# Altium PCB Subtrator OPAMP.PcbDoc
Units mm, origin at the board's own origin, x right, y up, seen from the top; angles counter-clockwise.
Board outline 49.16 x 33.53 mm, 2 copper layers (Top Layer, Bottom Layer); 30 components, 20 nets, 78 pads, 4 vias.
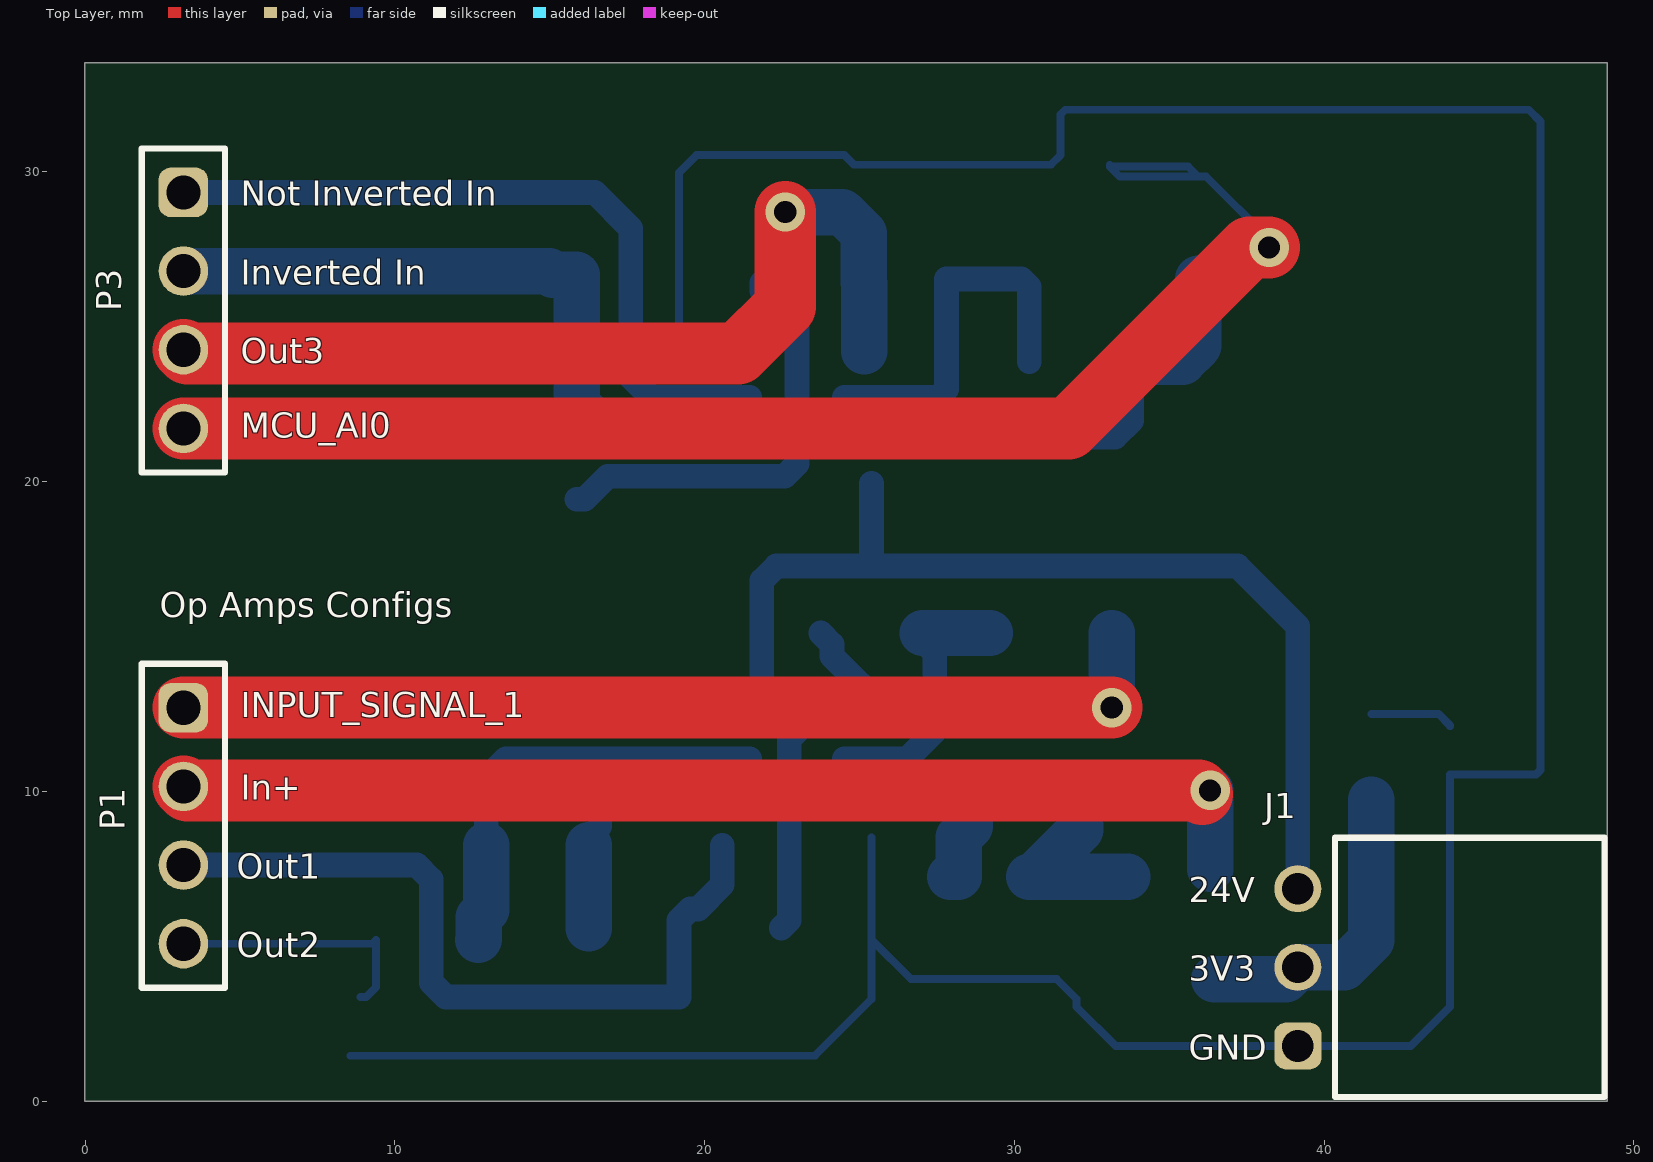
[diagram p0: Top Layer view]
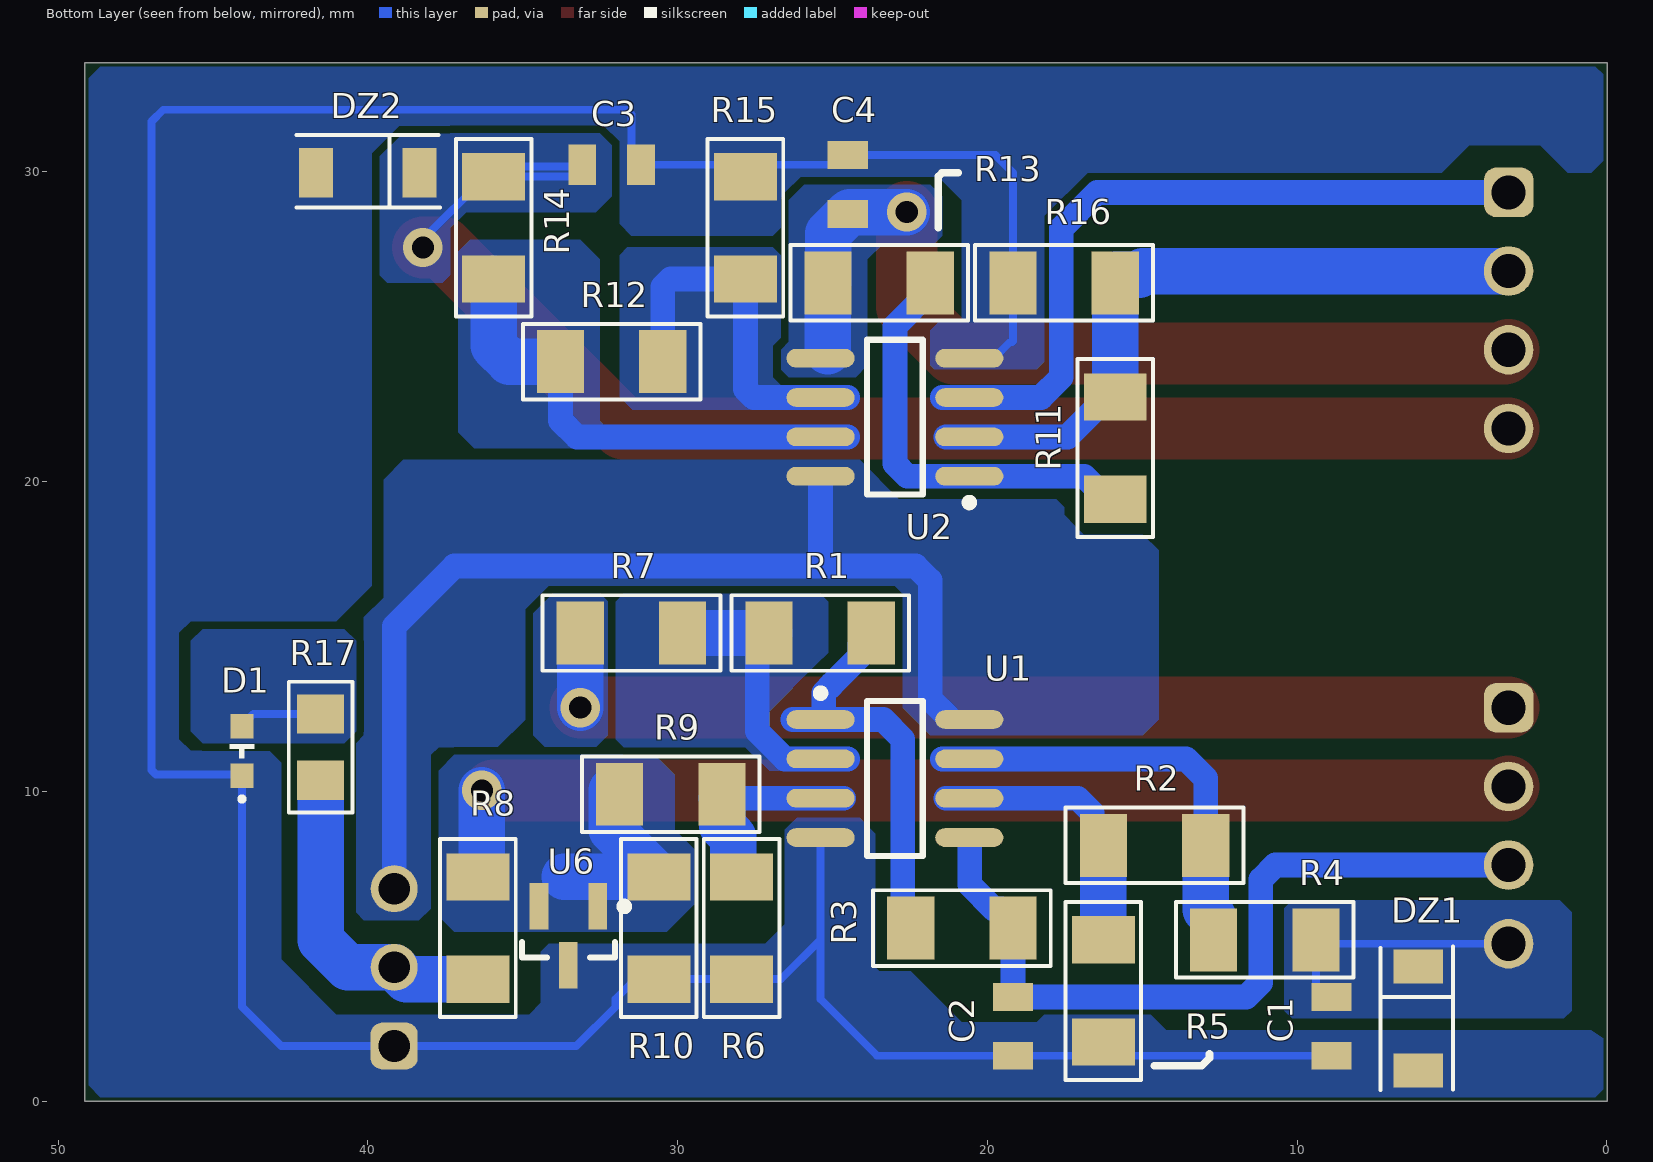
[diagram p1: Bottom Layer view, seen from below]
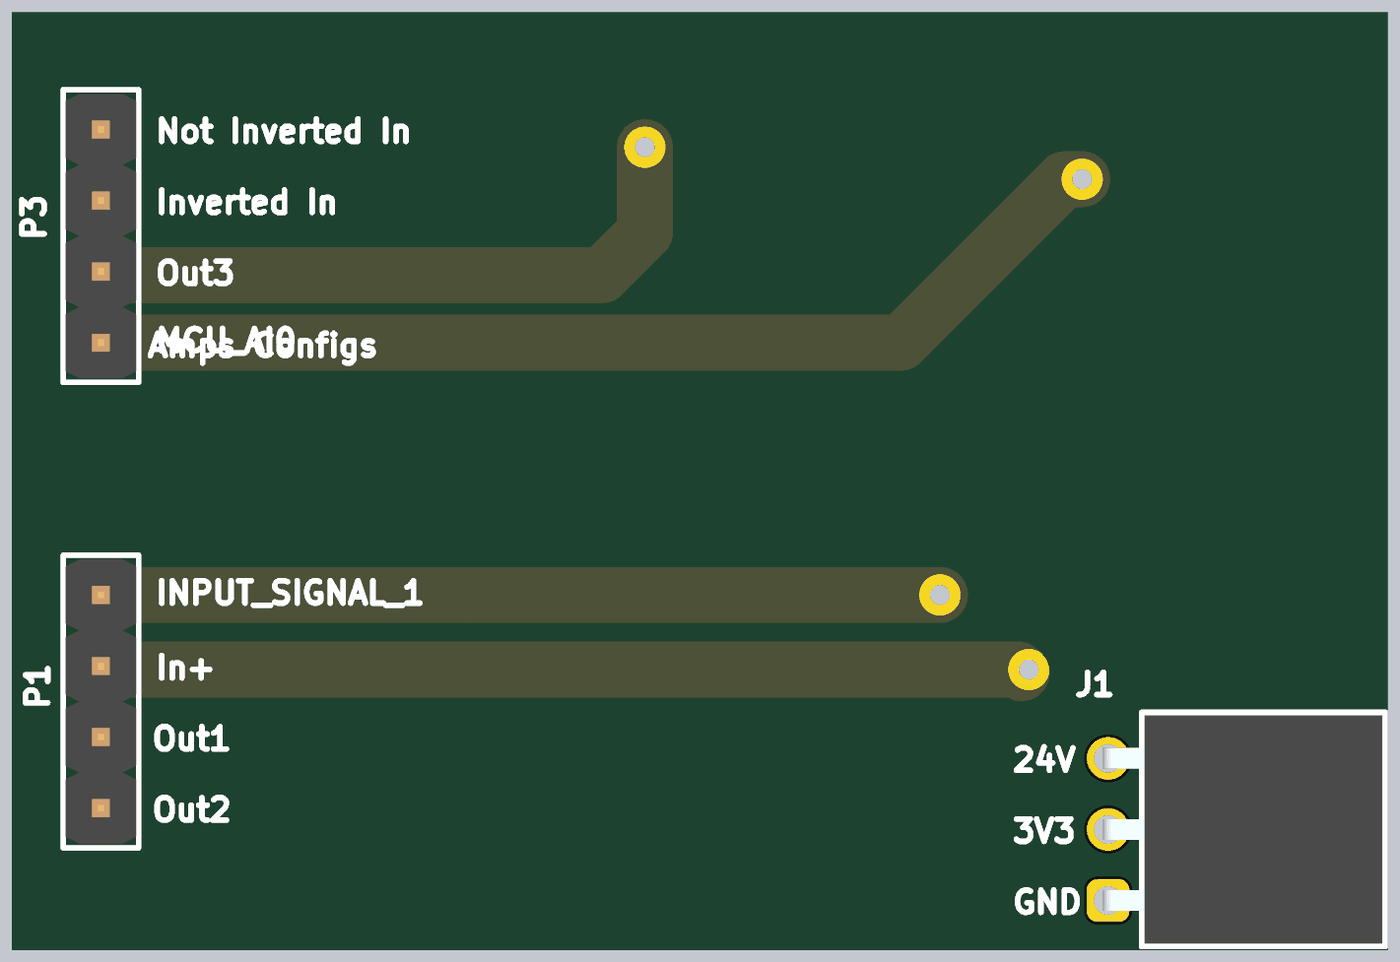
[diagram p2: 3D render of the assembled board from above, using the file's embedded part models]
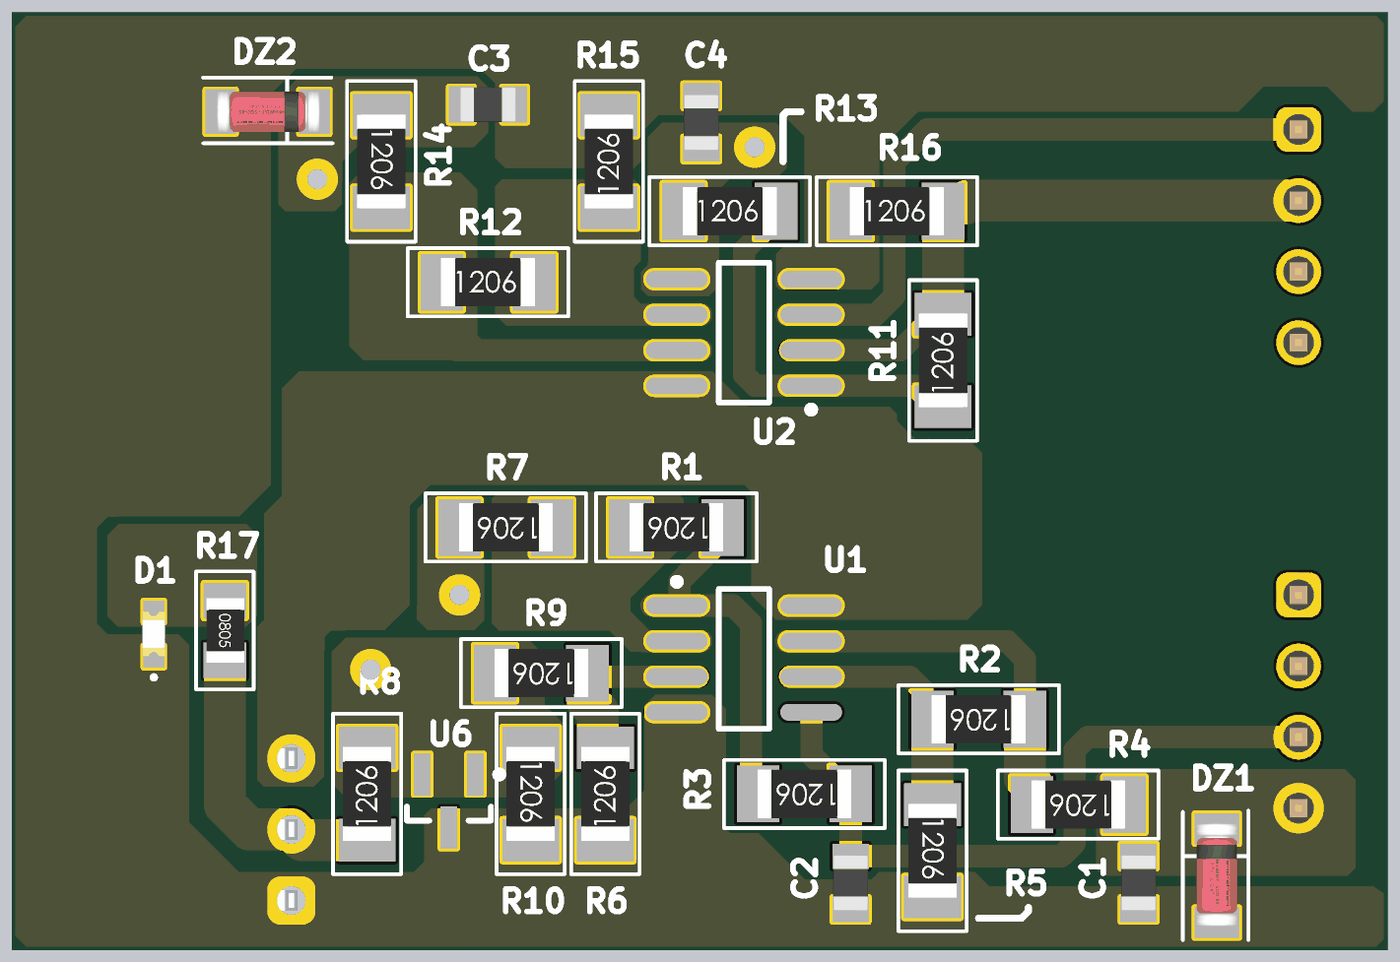
[diagram p3: 3D render of the assembled board from below, using the file's embedded part models]

## Layer stack, top to bottom
Top Solder: solder mask 0.0102, Solder Resist, Dk 3.5
Top Layer: signal copper 0.0356
Dielectric 1: dielectric 0.32, FR-4, Dk 4.8
Bottom Layer: signal copper 0.0356
Bottom Solder: solder mask 0.0102, Solder Resist, Dk 3.5

## Board outline
-0.015,0 49.149,0 49.149,33.528 -0.015,33.528

## Design rules (kind name [scope] priority, off if disabled: settings)
Clearance [All] p1: gap=0.254 ignorepadtopadclearanceinfootprint=FALSE except(0: Arc-Hole Track-Hole SMDPad-Hole THPad-Hole Via-Hole Fill-Hole Poly-Hole Region-Hole Text-Hole; 0.1: Arc-Arc Arc-Track Arc-SMDPad Arc-THPad Arc-Via Arc-Fill Arc-Poly Arc-Region Arc-Text Track-Track Track-SMDPad Track-THPad Track-Via Track-Fill Track-Poly Track-Region Track-Text)
PlaneConnect [All] p1: planeconnectstyle=Direct reliefexpansion=0.508 reliefentries=4 reliefconductorwidth=0.254 reliefairgap=0.254
PolygonConnect [All] p1: connectstyle=Direct reliefconductorwidth=0.254 reliefentries=4 polygonreliefangle="90 Angle" airgapwidth=0.254
RoutingVias [All] p1: holewidth=0.711 width=1.27 viastyle="Through Hole" minholewidth=0.711 minwidth=1.27 maxholewidth=0.711 maxwidth=1.27
SolderMaskExpansion [All] p1: expansion=0.102 istentingtop=FALSE
Width [All] p1: maxlimit=15 minlimit=0.254 preferedwidth=0.254 minimp=50.000000 maximp=50.000000 favimp=50.000000
29 further rules are at their usual default settings.

## Components (designator, comment, footprint, x,y, rotation, side; value= is the part's Value field where it differs from the comment)
C1 "TBD" WCAP-CSGP_0805_H=0.6mm_Reflow 8.89,2.413 r90 bottom
C2 "TBD" WCAP-CSGP_0805_H=0.6mm_Reflow 19.177,2.413 r90 bottom
C3 "TBD" WCAP-CSGP_0805_H=0.6mm_Reflow 32.131,30.228 r0 bottom
C4 "TBD" WCAP-CSGP_0805_H=0.6mm_Reflow 24.513,29.591 r270 bottom
D1 "Red, 2V, 140°" WL-SMCD_0603 44.069,11.303 r90 bottom
DZ1 "3V3/0.5W" SOD80 6.096,2.667 r270 bottom
DZ2 "3V3/0.5W" SOD80 40.005,29.972 r0 bottom
J1 "613003143121" 613003143121 44.704,4.318 r90 top
P1 "61300411121" 61300411121 3.175,8.89 r270 top
P3 "61300411121" 61300411121 3.175,25.527 r270 top
R1 "TBD" SM/R_1206 25.4,15.113 r0 bottom
R2 "0R" SM/R_1206 14.605,8.255 r0 bottom
R3 "TBD" SM/R_1206 20.828,5.588 r0 bottom
R4 "SMRes" SM/R_1206 11.049,5.207 r0 bottom
R5 "NM" SM/R_1206 16.256,3.556 r270 bottom
R6 "TBD" SM/R_1206 27.94,5.588 r90 bottom
R7 "TBD" SM/R_1206 31.496,15.113 r0 bottom
R8 "220R" SM/R_1206 36.449,5.588 r90 bottom
R9 "TBD" SM/R_1206 30.226,9.906 r0 bottom
R10 "NM" SM/R_1206 30.607,5.588 r270 bottom
R11 "TBD" SM/R_1206 15.875,21.082 r90 bottom
R12 "0R" SM/R_1206 32.131,23.876 r180 bottom
R13 "TBD" SM/R_1206 23.495,26.416 r180 bottom
R14 "SMRes" SM/R_1206 35.941,28.194 r270 bottom
R15 "NM" SM/R_1206 27.813,28.194 r90 bottom
R16 "TBD" SM/R_1206 17.526,26.416 r180 bottom
R17 "65R" SM/R_0805 41.529,11.43 r270 bottom
U1 "LM2903D" SO8_N 22.987,10.414 r180 bottom
U2 "LM2903D" SO8_N 22.987,22.079 r0 bottom
U6 "TL431AIL3T" SOT23-3_N 33.528,5.334 r270 bottom

## Footprints (in the part's own frame and the unit in brackets; to place one, negate y for a bottom-side part, rotate by r counter-clockwise, add the part's x,y. Pads: shape width x height; smd on the part's side, far side on the other; paste and mask are expansions set on the pad)
61300411121 [mm] "Pin Header, pitch 2.54 mm, THT, Vertical, single row, 4p"
  rrect50% 1.6x1.6 hole 1.1: 1(-3.81,0)
  round 1.6 hole 1.1: 2(-1.27,0) 3(1.27,0) 4(3.81,0)
  silkscreen extent -5.23,-1.35 5.23,1.35, body extent -5.08,-1.27 5.08,1.27, height 8.57
613003143121 [mm] "Socket Header, Pitch 2.54 mm, THT, Angled, single row, 3p"
  rrect50% 1.52x1.52 hole 1.02: 1(-2.54,5.55)
  round 1.52 hole 1.02: 2(0,5.55) 3(2.54,5.55)
  silkscreen extent -4.19,-4.35 4.19,4.35, body extent -4.06,-4.25 4.06,5.75, height 2.55
SM/R_0805 [mil]
  rect 50x60 smd: 1(-42,0) 2(42,0)
  silkscreen extent -83,-41 83,41, body extent -45,-26 45,27, height 30
SM/R_1206 [mil]
  rect 60x80 smd: 1(-65,0) 2(65,0)
  silkscreen extent -113,-48 113,48, body extent -66,-34 66,34, height 33
SO8_N [mm] "SOIC, 8-Leads, Body 4.9x3.9mm, Pitch 1.27mm, IPC Medium Density"
  oval 2.2x0.6 smd: 1(-2.4,1.905) 2(-2.4,0.635) 3(-2.4,-0.635) 4(-2.4,-1.905) 5(2.4,-1.905) 6(2.4,-0.635) 7(2.4,0.635) 8(2.4,1.905)
  silkscreen extent -2.53,-2.5 0.9,2.88, body extent -1.95,-2.45 1.95,2.45, height 1.75
SOD80 [mm] "LL4148"
  rect 1.1x1.6 smd: A(1.675,0) K(-1.675,0)
  silkscreen extent -2.32,-1.22 2.3,1.13, body extent -1.88,-0.8 1.82,0.8, height 1.6
SOT23-3_N [mm] "SOT23, 3-Leads, Body 2.9x1.3mm, Pitch 0.95mm, Lead Span 2.4mm, IPC Medium Density"
  rect 1.5x0.6 smd: 1(-0.95,0.95) 2(-0.95,-0.95) 3(0.95,0)
  silkscreen extent -1.07,-1.5 0.7,1.92, body extent -0.7,-1.52 0.7,1.52, height 1.12
WCAP-CSGP_0805_H=0.6mm_Reflow [mm] "Ceramic Capacitors, body 2x1.25mm"
  rect 0.9x1.3 smd: 1(-0.95,0) 2(0.95,0)
  body extent -1,-0.62 1,0.63, height 0.6
WL-SMCD_0603 [mm] "SMD Mono-color Chip LED, body 1.6x0.8mm"
  rect 0.8x0.75 smd: 1(-0.8,0) 2(0.8,0)
  silkscreen extent -1.62,-0.4 0.22,0.4, body extent -0.8,-0.4 0.8,0.4, height 0.42

## Part data
C1 C2 C3 C4: library part 885012007010, "WCAP-CSGP Multilayer Ceramic Chip Capacitor, General Purpose, size 0805, NP0, 10pF, 16V", Capacitance=10pF, Capacitance Tolerance=+/-5%, Isolation Resistance=>=10GOhm, Manufacturer="Wurth Elektronik", Operating Temperature="-55 to +125degC", Rated Voltage=16VDC, Ceramic Type=NP0, ComponentLink1Description=Manufacturer, ComponentLink1URL=http://www.we-online.de, ComponentLink2Description=Datasheet, ComponentLink2URL=https://www.we-online.com/catalog/datasheet/885012007010.pdf, Dissipation Factor=Q>=400+20C, Height=0.6mm, Manufacturer Part Number=885012007010, Mounting Technology=SMT, Packaging="Tape and Reel", Published Date="May 2020", Size=0805, Technical Reference=NP00805100J016DFCT10000
D1: library part 150060RS55040, "WL-SMCD Mono-color Chip LED Diffused, SMT, size 0603, Red, 2V, 140°", Case/Size Code=0603, Emitting Color=Red, Forward Voltage=2V, Manufacturer="Wurth Elektronik", Operating Temperature Max=85°C, Operating Temperature Min=-40°C, Category="Signal LEDs", Chip Technology=AlInGaP, ComponentLink1Description="Website Link", ComponentLink1URL=https://www.we-online.com/redexpert/article/150060RS55040?ad, ComponentLink2Description="Datasheet Link", ComponentLink2URL=https://www.we-online.com/redexpert/spec/150060RS55040?ad, Dominant Wavelength=624nm, Height=0.4mm, Length=1.6mm, Luminous Intensity=90mcd, Manufacturer Part Number=150060RS55040, Match Code=WL-SMCD, Mount="Surface Mount", Packaging="Tape and Reel", Peak Wavelength=632nm, Viewing Angle=140°, Width=0.8mm
DZ1 DZ2: library part SOD80_zener, "DIODE ZENER 22V 500MW SOD80C", Manufacturer=Nexperia, Manufacturer Part Number=BZV55-C22,115, Supplier Part Number 1=96K7268, Category="Zener Diodes", ComponentLink1Description=https://assets.nexperia.com/documents/data-sheet/BZV55_SER.pdf?src-supplier=Digi-Key, ComponentLink1URL=https://assets.nexperia.com/documents/data-sheet/BZV55_SER.pdf?src-supplier=Digi-Key, Pricing 1="5=0.22000, 10=0.20800, 25=0.14200, 50=0.11200, 100=0.09200, 250=0.07200, 500=0.05500, 1000=0.04800 (USD)", RoHS=Yes, RoHS Compliant=Yes, Stock 1=10881, Supplier 1=Newark
J1: "WR-PHD Socket Header, THT, Angled, pitch 2.54mm, 1 Row, 3P", Contact Resistance=20mΩ, Manufacturer="Wurth Elektronik", Operating Temperature Max=125°C, Operating Temperature Min=-40°C, Rated Current=3A, Withstanding Voltage=500V, Working Voltage=250V, Category="Board-to-Board Connectors", ComponentLink1Description="Website Link", ComponentLink1URL=https://www.we-online.com/redexpert/article/613003143121?ad, ComponentLink2Description="Datasheet Link", ComponentLink2URL=https://www.we-online.com/redexpert/spec/613003143121?ad, Gender="Socket Header", Manufacturer Part Number=613003143121, Match Code=WR-PHD, Mount="Through Hole", Number of Pins=3, Number of Rows=1, Orientation=Angled, Packaging=Tray, Pitch=2.54mm
P1 P3: "WR-PHD Pin Header, THT, Vertical, pitch 2.54mm, 1 Row, 4P", Contact Resistance=20mΩ, Manufacturer="Wurth Elektronik", Operating Temperature Max=105°C, Operating Temperature Min=-40°C, Rated Current=3A, Withstanding Voltage=500V, Working Voltage=250V, Category="Board-to-Board Connectors", ComponentLink1Description="Website Link", ComponentLink1URL=https://www.we-online.com/redexpert/article/61300411121?ad, ComponentLink2Description="Datasheet Link", ComponentLink2URL=https://www.we-online.com/redexpert/spec/61300411121?ad, Gender="Pin Header", Manufacturer Part Number=61300411121, Match Code=WR-PHD, Mount="Through Hole", Number of Pins=4, Number of Rows=1, Orientation=Vertical, Packaging=Bag, Pitch=2.54mm
R1 R2 R3 R5 R6 R7 R8 R9 R10 R11 R12 R13 R15 R16 R17: library part SMRes, "SMD Resistor", Resistor Type="FIXED RESISTOR", Category="Chip SMD Resistors", Mount="Surface Mount", Mounting=SMD, Number of Pins=2, Pricing 1="10=0.67400, 100=0.52000, 250=0.49300, 500=0.33100, 1000=0.28900 (USD)", RoHS=Yes, Stock 1=1
R4 R14: "SMD Resistor", Resistor Type="FIXED RESISTOR", Category="Chip SMD Resistors", Mount="Surface Mount", Mounting=SMD, Number of Pins=2, Pricing 1="10=0.67400, 100=0.52000, 250=0.49300, 500=0.33100, 1000=0.28900 (USD)", RoHS=Yes, Stock 1=1
U1 U2: "Low-Power Dual Voltage Comparator", Code_IPC=SOIC127P600-8, Code_JEDEC=MS-012-AA, ComponentLink1Description="Manufacturer Link", ComponentLink1URL=http://www.st.com/, ComponentLink2Description=Datasheet, ComponentLink2URL=http://www.st.com/stonline/products/literature/ds/2470/lm2903.pdf, DatasheetVersion=Oct-1999, LatestRevisionDate=13-Apr-2006, LatestRevisionNote="IPC-7351 Footprint Added.", PackageDescription="8-Pin Small Outline Integrated Circuit 1.27 mm Pitch", PackageReference=SO8, PackageVersion=Dec-2002, Published=24-Aug-2001, Publisher="Altium Limited"
U6: "STMICROELECTRONICS - TL431AIL3T - Voltage Reference, AEC-Q100, Shunt - Adjustable, 2.5V to 36V, 1 % Ref, SOT-23-3", Case/Package=SOT-23-3, Cathode Current=700uA, Manufacturer=STMicroelectronics, Max Input Voltage=37V, Max Operating Temperature=105°C, Max Output Current=100mA, Max Output Voltage=36V, Min Operating Temperature=-40°C, Package Quantity=1, Reference Voltage=2.495V, Supplier Part Number 1=497-11295-1-ND, Tolerance=1%, Accuracy=1%, Category="Voltage References", ComponentLink1Description="Manufacturer URL", ComponentLink1URL=http://www.st.com, ComponentLink2Description=Datasheet, ComponentLink2URL=http://www.st.com/internet/com/TECHNICAL_RESOURCES/TECHNICAL_LITERATURE/DATASHEET/CD00000986.pdf, ComponentLink3Description=https://datasheet.ciiva.com/41424/001184461-da-01-en-ic-vref-shunt-pr-tl431ail3t-sot-23-3-stm-41424435.pdf?src-supplier=Conrad, ComponentLink3URL=https://datasheet.ciiva.com/41424/001184461-da-01-en-ic-vref-shunt-pr-tl431ail3t-sot-23-3-stm-41424435.pdf?src-supplier=Conrad, ComponentLink4Description=https://datasheet.ciiva.com/2006/cd00000986-2006624.pdf?src-supplier=Digi-Key, ComponentLink4URL=https://datasheet.ciiva.com/2006/cd00000986-2006624.pdf?src-supplier=Digi-Key, ComponentLink5Description=https://datasheet.ciiva.com/2006/cd00000986-2006625.pdf?src-supplier=Digi-Key, ComponentLink5URL=https://datasheet.ciiva.com/2006/cd00000986-2006625.pdf?src-supplier=Digi-Key, ComponentLink6Description=https://datasheet.ciiva.com/2006/cd00000986-2006626.pdf?src-supplier=Digi-Key, ComponentLink6URL=https://datasheet.ciiva.com/2006/cd00000986-2006626.pdf?src-supplier=Digi-Key, ComponentLink7Description=https://datasheet.ciiva.com/4908/cd00000986-4908895.pdf?src-supplier=Mouser, ComponentLink7URL=https://datasheet.ciiva.com/4908/cd00000986-4908895.pdf?src-supplier=Mouser, ComponentLink8Description=https://datasheet.ciiva.com/17565/cd00000986-17565254.pdf?src-supplier=Avnet+Europe, ComponentLink8URL=https://datasheet.ciiva.com/17565/cd00000986-17565254.pdf?src-supplier=Avnet+Europe, DatasheetVersion=Oct-2011, Lead Free="Lead Free", Manufacturer Part Number=TL431AIL3T, Mount="Surface Mount", Number of Channels=1, Number of Pins=3, Output Current=100mA, Output Voltage=36V, PackageDescription="3-Pin SOT-23 Package 0.95 mm Pitch, 2.4 mm Lead Span", PackageReference=SOT23-3, PackageVersion=2011, Packaging="Tape and Reel", Pricing 1="1=0.47000, 10=0.38000, 25=0.34720, 100=0.25850, 250=0.23424, 500=0.19386, 1000=0.14539 (USD)", Radiation Hardening=No, Reference Type=Shunt,Adjustable, RoHS=Yes, RoHS Compliant=Yes, Series=-, Stock 1=3767, Supplier 1=Digi-Key

## Via types
v1: diameter 1.27, hole 0.711, Top Layer to Bottom Layer, 4 vias

## Nets (pads, with @x,y where several pads share a name; then routed paths per layer and width w, separated by ;. In a path a pad name is that pad's centre, name@x,y a point inside that pad or via, vN(x,y) a via of type N, cw(c..) or ccw(c..) an arc to the next point about the centre after c; other vN are vias at no path point)
3V3: J1.2 R8.1 R17.2 | length 10.1
  Bottom Layer w1.5: R8.1 38.768,3.937 39.149,4.318 J1.2 40.65,4.318 41.529,5.197 R17.2@41.529,9.728
+24: J1.3 U1.8 U2.8 | length 34.1
  Bottom Layer w0.8: U1.8@21.287,12.419 21.844,12.976 21.844,16.803 22.313,17.272 25.4,17.272 ; U2.8@25.387,19.939 25.387,17.285 25.4,17.272 ; J1.3 39.154,15.329 37.211,17.272 25.4,17.272
INPUT+: P1.2 R8.2 R9.2 R10.1 U6.1 U6.2 | length 42.5
  Top Layer w2: P1.2 3.302,10.033 35.941,10.033 v1@36.068,9.906
  Bottom Layer w0.254: R8.2@36.322,7.493 R8.2@36.449,7.366
  Bottom Layer w1.5: R10.1@30.48,7.239 33.655,7.239 ; R10.1 30.861,7.239 30.873,7.251 30.873,7.505 32.131,8.763 R9.2@32.131,10.033 ; R8.2@36.322,7.493 v1(36.322,10.033)
INPUT-: P1.1 R7.2 | length 32.4
  Top Layer w2: P1.1 v1(33.147,12.7)
  Bottom Layer w1.5: v1(33.147,12.7) R7.2
INPUT_INVERTED: P3.2 R11.2 R16.2 U2.2 | length 22.7
  Bottom Layer w0.254: R11.2 R11.2@16.129,22.733
  Bottom Layer w0.8: R11.2@16.129,22.733 17.418,21.444 U2.2 U2.2@21.336,21.444
  Bottom Layer w1.5: P3.2 14.984,26.797 15.099,26.682 15.863,26.682 15.875,26.67 R11.2
INPUT_SENSE: P3.1 U2.3 | length 23.8
  Bottom Layer w0.8: P3.1 16.457,29.337 17.621,28.172 17.621,23.368 18.275,22.714 U2.3 U2.3@21.463,22.714
NetD1_2: D1.2 R17.1 | length 2.7
  Bottom Layer w0.254: R17.1 43.7,12.497 44.069,12.128 D1.2
NetR1_1: R1.1 R3.2 U1.1 | length 13.4
  Bottom Layer w0.8: R3.2 22.733,5.842 22.733,11.684 23.368,12.319 U1.1 U1.1@26.289,12.319 ; R1.1 24.111,14.751 24.111,14.37 25.019,13.462 25.019,13.45 25.287,13.182 U1.1@25.287,12.419
NetR1_2: R1.2 R7.1 U1.2 | length 8.8
  Bottom Layer w0.8: U1.2@24.511,11.049 26.543,11.049 27.432,11.938 27.432,14.478 27.051,14.859 R1.2
  Bottom Layer w1.5: R1.2 R7.1@29.21,15.113
NetR2_1: R2.1 R4.2 U1.7 | length 14.1
  Bottom Layer w0.8: R2.1 12.954,10.414 13.589,11.049 U1.7 U1.7@21.463,11.049
  Bottom Layer w1.5: R4.2 12.712,5.219 12.712,5.936 12.954,6.178 R2.1
NetR2_2: R2.2 R5.1 U1.6 | length 9.3
  Bottom Layer w0.254: R5.1 16.383,5.207 16.51,5.334 R5.1@16.256,5.588 ; R2.2 R2.2@16.256,8.832
  Bottom Layer w0.8: R2.2@16.579,8.832 16.618,8.871 16.618,9.31 17.087,9.779 U1.6@21.336,9.779
  Bottom Layer w1.5: R5.1@16.256,5.588 R2.2
NetR6_2: R6.2 R9.1 U1.3 | length 6.9
  Bottom Layer w0.8: U1.3@24.638,9.779 U1.3 R9.1@28.575,9.779
  Bottom Layer w1.5: R6.2 28.194,7.239 28.206,7.251 28.206,8.521 28.563,8.878 28.563,9.767 R9.1@28.575,9.779
NetR11_1: R11.1 R13.2 U2.1 | length 13.9
  Bottom Layer w0.8: R11.1 16.129,19.431 16.872,20.174 22.587,20.174 22.987,20.574 22.987,25.019 21.844,26.162 R13.2
NetR12_1: R12.1 R14.2 U2.7 | length 15.9
  Bottom Layer w0.8: U2.7@24.511,21.444 U2.7 33.255,21.444 33.782,21.971 R12.1
  Bottom Layer w1.5: R12.1 35.433,23.876 35.941,24.384 R14.2
NetR12_2: R12.2 R15.1 U2.6 | length 12.2
  Bottom Layer w0.8: U2.6@24.511,22.714 U2.6 27.54,22.714 27.813,22.987 R15.1 30.226,26.543 30.48,26.289 R12.2
OUT1: C2.2 P1.3 R3.1 U1.5 | length 25.3
  Bottom Layer w0.8: P1.3 10.707,7.62 11.176,7.151 11.176,3.832 11.645,3.363 C2.2 R3.1 19.177,5.842 19.539,6.204 19.793,6.204 20.574,6.985 U1.5@20.574,8.255
OUT2: C1.2 DZ1.K P1.4 R4.1 | length 8.4
  Bottom Layer w0.254: P1.4 9.271,5.08 R4.1 9.398,3.686 9.075,3.363 C1.2
OUT3: C4.2 P3.3 R13.1 U2.5 | length 29.8
  Top Layer w2: P3.3 3.302,24.13 21.082,24.13 22.606,25.654 v1(22.606,28.702)
  Bottom Layer w1.5: v1(22.606,28.702) 24.452,28.702 25.134,28.02 25.134,26.428 R13.1@25.158,26.404 ; R13.1 R13.1@25.158,26.404 ; U2.5@25.158,24.213 R13.1@25.158,26.404
OUT4: C3.2 DZ2.K P3.4 R14.1 | length 46.9
  Top Layer w2: P3.4 31.75,21.717 37.592,27.559 v1(38.227,27.559)
  Bottom Layer w0.254: C3.2 C3.2@33.081,30.168 ; v1(38.227,27.559) 38.227,27.813 36.195,29.845 R14.1 ; C3.2@33.081,30.168 35.618,30.168 R14.1 ; C3.2@33.081,30.168 33.404,29.845 R14.1
Signal_Ref: C1.1 C2.1 C3.1 C4.1 D1.1 DZ1.A DZ2.A J1.1 R5.2 R6.1 R10.2 R15.2 R16.1 U1.4 U2.4 U6.3 | length 111.9
  Bottom Layer w0.254: C1.1@8.572,1.463 16.256,1.463 C2.1 23.561,1.463 25.387,3.289 25.387,5.22 ; U2.4 19.787,23.984 19.26,24.511 19.199,24.511 19.177,24.533 R16.1 19.177,29.972 19.746,30.541 C4.1 24.826,30.228 27.813,30.228 C3.1 31.496,30.543 31.496,31.855 31.645,32.004 46.609,32.004 46.99,31.623 46.99,10.69 46.841,10.541 44.069,10.541 44.069,3.048 42.799,1.778 J1.1 33.274,1.778 32.004,3.048 32.004,3.302 31.369,3.937 29.718,3.937 28.321,3.937 26.67,3.937 25.387,5.22 ; U1.4 25.387,5.22

## Polygon pours and split planes (outlines as drawn)
NetR12_1 on Bottom Layer "NETR12_1_L02_P008" (solid, pour order 8): 36.576,21.082 37.084,21.59 37.084,27.432 36.703,27.813 33.147,27.813 32.512,27.178 32.512,21.971 32.004,21.463 32.004,21.082
OUT4 on Bottom Layer "OUT4_L02_P002" (solid, pour order 2): 36.83,28.702 37.338,28.194 37.338,26.67 37.592,26.416 39.37,26.416 39.624,26.67 39.624,30.607 38.989,31.242 38.984,31.237 38.359,31.237 38.354,31.242 32.512,31.242 32.131,30.861 32.131,29.21 32.639,28.702
INPUT+ on Bottom Layer "INPUT+_L02_P005" (solid, pour order 5): 30.099,8.763 29.464,8.128 29.464,6.35 30.353,5.461 37.211,5.461 37.719,5.969 37.719,10.668 37.211,11.176 30.734,11.176 30.099,10.541
INPUT- on Bottom Layer "INPUT-_L02_P010" (solid, pour order 10): 32.258,11.811 32.639,11.43 34.29,11.43 34.671,11.811 34.671,15.748 34.036,16.383 32.512,16.383 32.258,16.129
NetR1_2 on Bottom Layer "NETR1_2_L02_P009" (solid, pour order 9): 25.527,14.097 25.146,14.478 25.146,16.129 25.4,16.383 31.75,16.383 32.004,16.129 32.004,11.684 31.75,11.43 27.813,11.43 27.051,10.668 26.162,10.668 26.162,11.176 27.051,12.065 27.051,12.573
+24 on Bottom Layer "+24_L02_P007" (solid, pour order 7): 14.478,17.78 14.986,18.288 16.891,18.288 17.526,18.923 17.526,19.177 17.78,19.431 18.415,19.431 22.86,19.431 24.13,20.701 38.862,20.701 39.497,20.066 39.497,16.256 40.132,15.621 40.132,11.811 40.386,11.557 40.386,6.096 40.132,5.842 38.354,5.842 37.973,6.223 37.973,11.176 37.719,11.43 35.814,11.43 34.925,12.319 34.925,15.875 34.163,16.637 22.987,16.637 22.733,16.383 22.733,12.7 21.844,11.811 14.986,11.811 14.478,12.319
Signal_Ref on Bottom Layer "SIGNAL_REF_L02_P006" (solid, pour order 6): 34.798,2.794 34.417,3.175 34.417,4.826 34.163,5.08 27.178,5.08 26.543,5.715 26.543,8.763 26.162,9.144 24.13,9.144 23.622,8.636 23.622,4.318 23.495,4.191 22.479,4.191 20.828,2.54 18.415,2.54 18.161,2.794 14.732,2.794 14.224,2.286 0.508,2.286 0.127,2.032 0.127,0.381 0.381,0.127 48.641,0.127 49.022,0.508 49.022,33.02 48.641,33.401 0.381,33.401 0.127,33.147 0.127,30.353 0.508,29.972 1.27,29.972 2.159,30.861 4.445,30.861 5.334,29.972 16.764,29.972 18.161,28.575 18.161,23.876 18.415,23.622 21.717,23.622 21.844,23.749 21.844,24.892 21.59,25.146 21.082,25.146 20.828,25.4 20.828,29.083 21.59,29.845 26.035,29.845 26.543,29.337 26.543,28.321 26.924,27.94 31.496,27.94 31.877,28.321 31.877,30.988 32.385,31.496 38.989,31.496 39.878,30.607 39.878,16.637 41.021,15.494 45.72,15.494 46.101,15.113 46.101,11.684 45.72,11.303 43.18,11.303 42.799,10.922 42.799,4.572 41.021,2.794
OUT3 on Bottom Layer "OUT3_L02_P004" (solid, pour order 4): 24.257,23.368 26.416,23.368 26.67,23.622 26.67,24.257 26.416,24.511 26.416,29.083 25.908,29.591 21.844,29.591 21.463,29.21 21.463,27.94 21.717,27.686 23.368,27.686 23.876,27.178 23.876,23.749
NetR12_2 on Bottom Layer "NETR12_2_L02_P003" (solid, pour order 3): 26.924,23.368 26.543,22.987 26.543,22.352 26.866,22.352 26.9,22.318 31.462,22.318 31.877,22.733 31.877,27.305 31.623,27.559 26.924,27.559 26.67,27.305 26.67,24.638 26.924,24.384
NetD1_2 on Bottom Layer "NETD1_2_L02_P001" (solid, pour order 1): 40.386,14.859 40.767,15.24 45.339,15.24 45.72,14.859 45.72,11.938 45.339,11.557 40.767,11.557 40.386,11.938
OUT2 on Bottom Layer "OUT2_L02_P000" (solid, pour order 0): 1.143,6.096 1.524,6.477 10.16,6.477 10.414,6.223 10.414,2.921 10.16,2.667 1.397,2.667 1.143,2.921

## Silkscreen, mask and mechanical layers (free items; w line width, h text height)
Top Overlay:
  text "Not Inverted In" at 5.026,28.902 h0.8
  text "Inverted In" at 5.026,26.362 h0.8
  text "Out3" at 5.026,23.822 h0.8
  text "MCU_AI0" at 5.026,21.415 h0.8
  text "Op Amps Configs" at 2.413,15.621 h0.8
  text "INPUT_SIGNAL_1" at 5.026,12.398 h0.8
  text "In+" at 5.026,9.725 h0.8
  text "Out1" at 4.899,7.185 h0.8
  text "24V" at 35.633,6.423 h0.8
  text "Out2" at 4.899,4.645 h0.8
  text "3V3" at 35.633,3.883 h0.8
  text "GND" at 35.633,1.343 h0.8
Bottom Overlay:
  lines w0.254: 12.827,1.524 12.827,1.397 13.081,1.143 14.605,1.143 ; 20.955,29.972 21.463,29.972 21.59,29.845 21.59,28.194
Mechanical 1:
  lines w0.254: 0,0 0,33.528 49.149,33.528 49.149,0 0,0